# EAGLE board mainboard (EAGLE 9.4.0), part 1 of 2
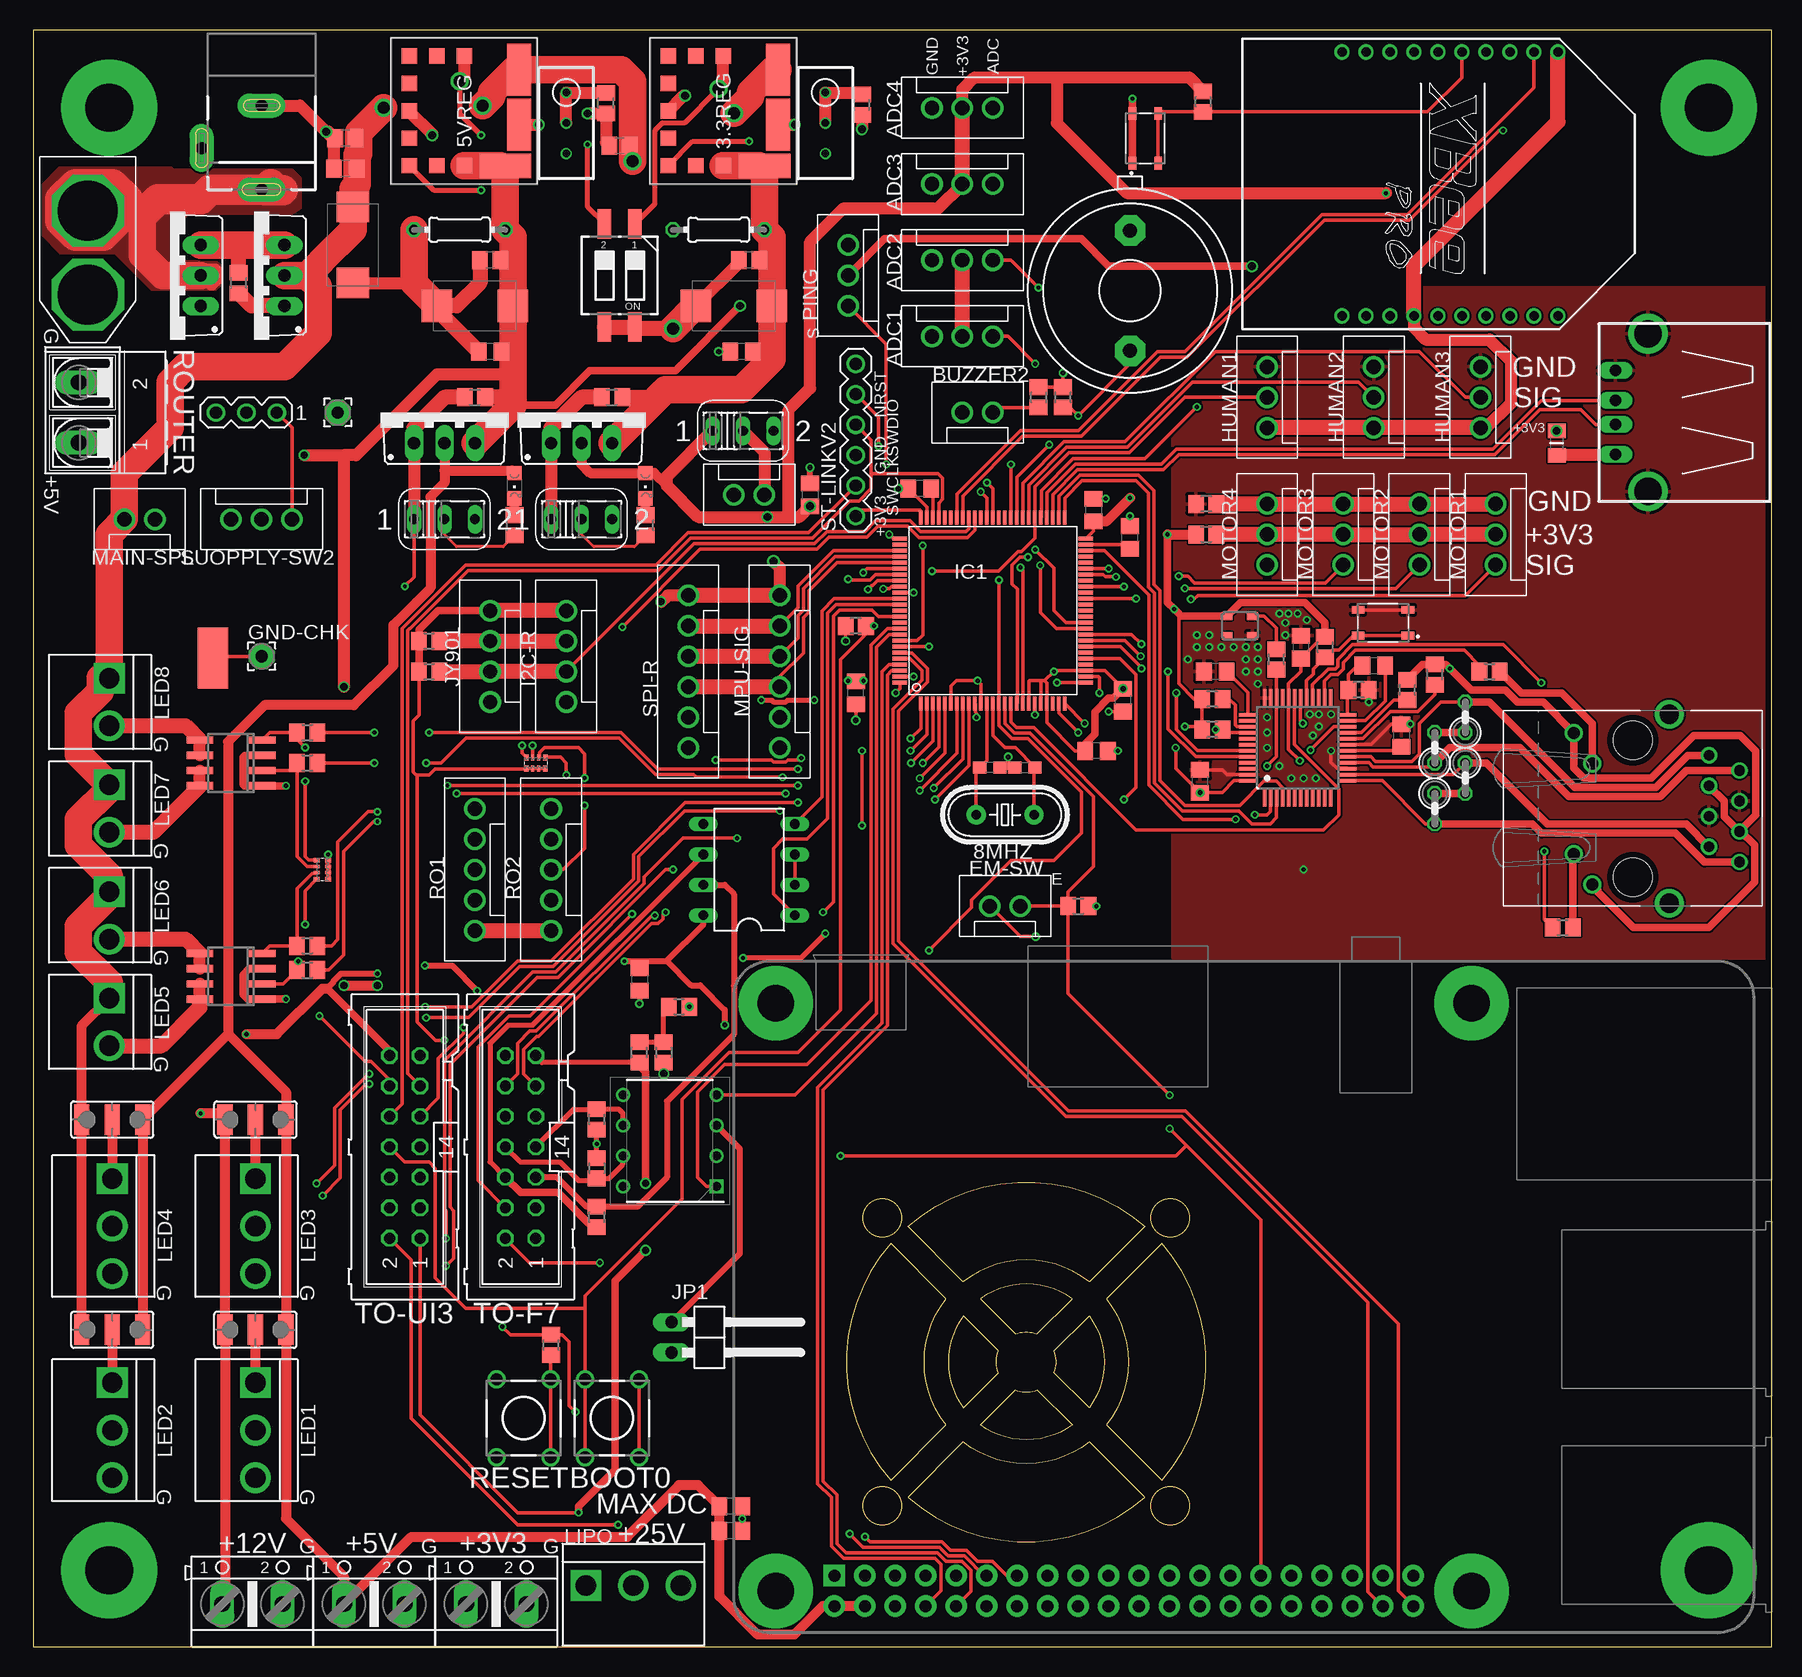
[diagram p0: board, top side]
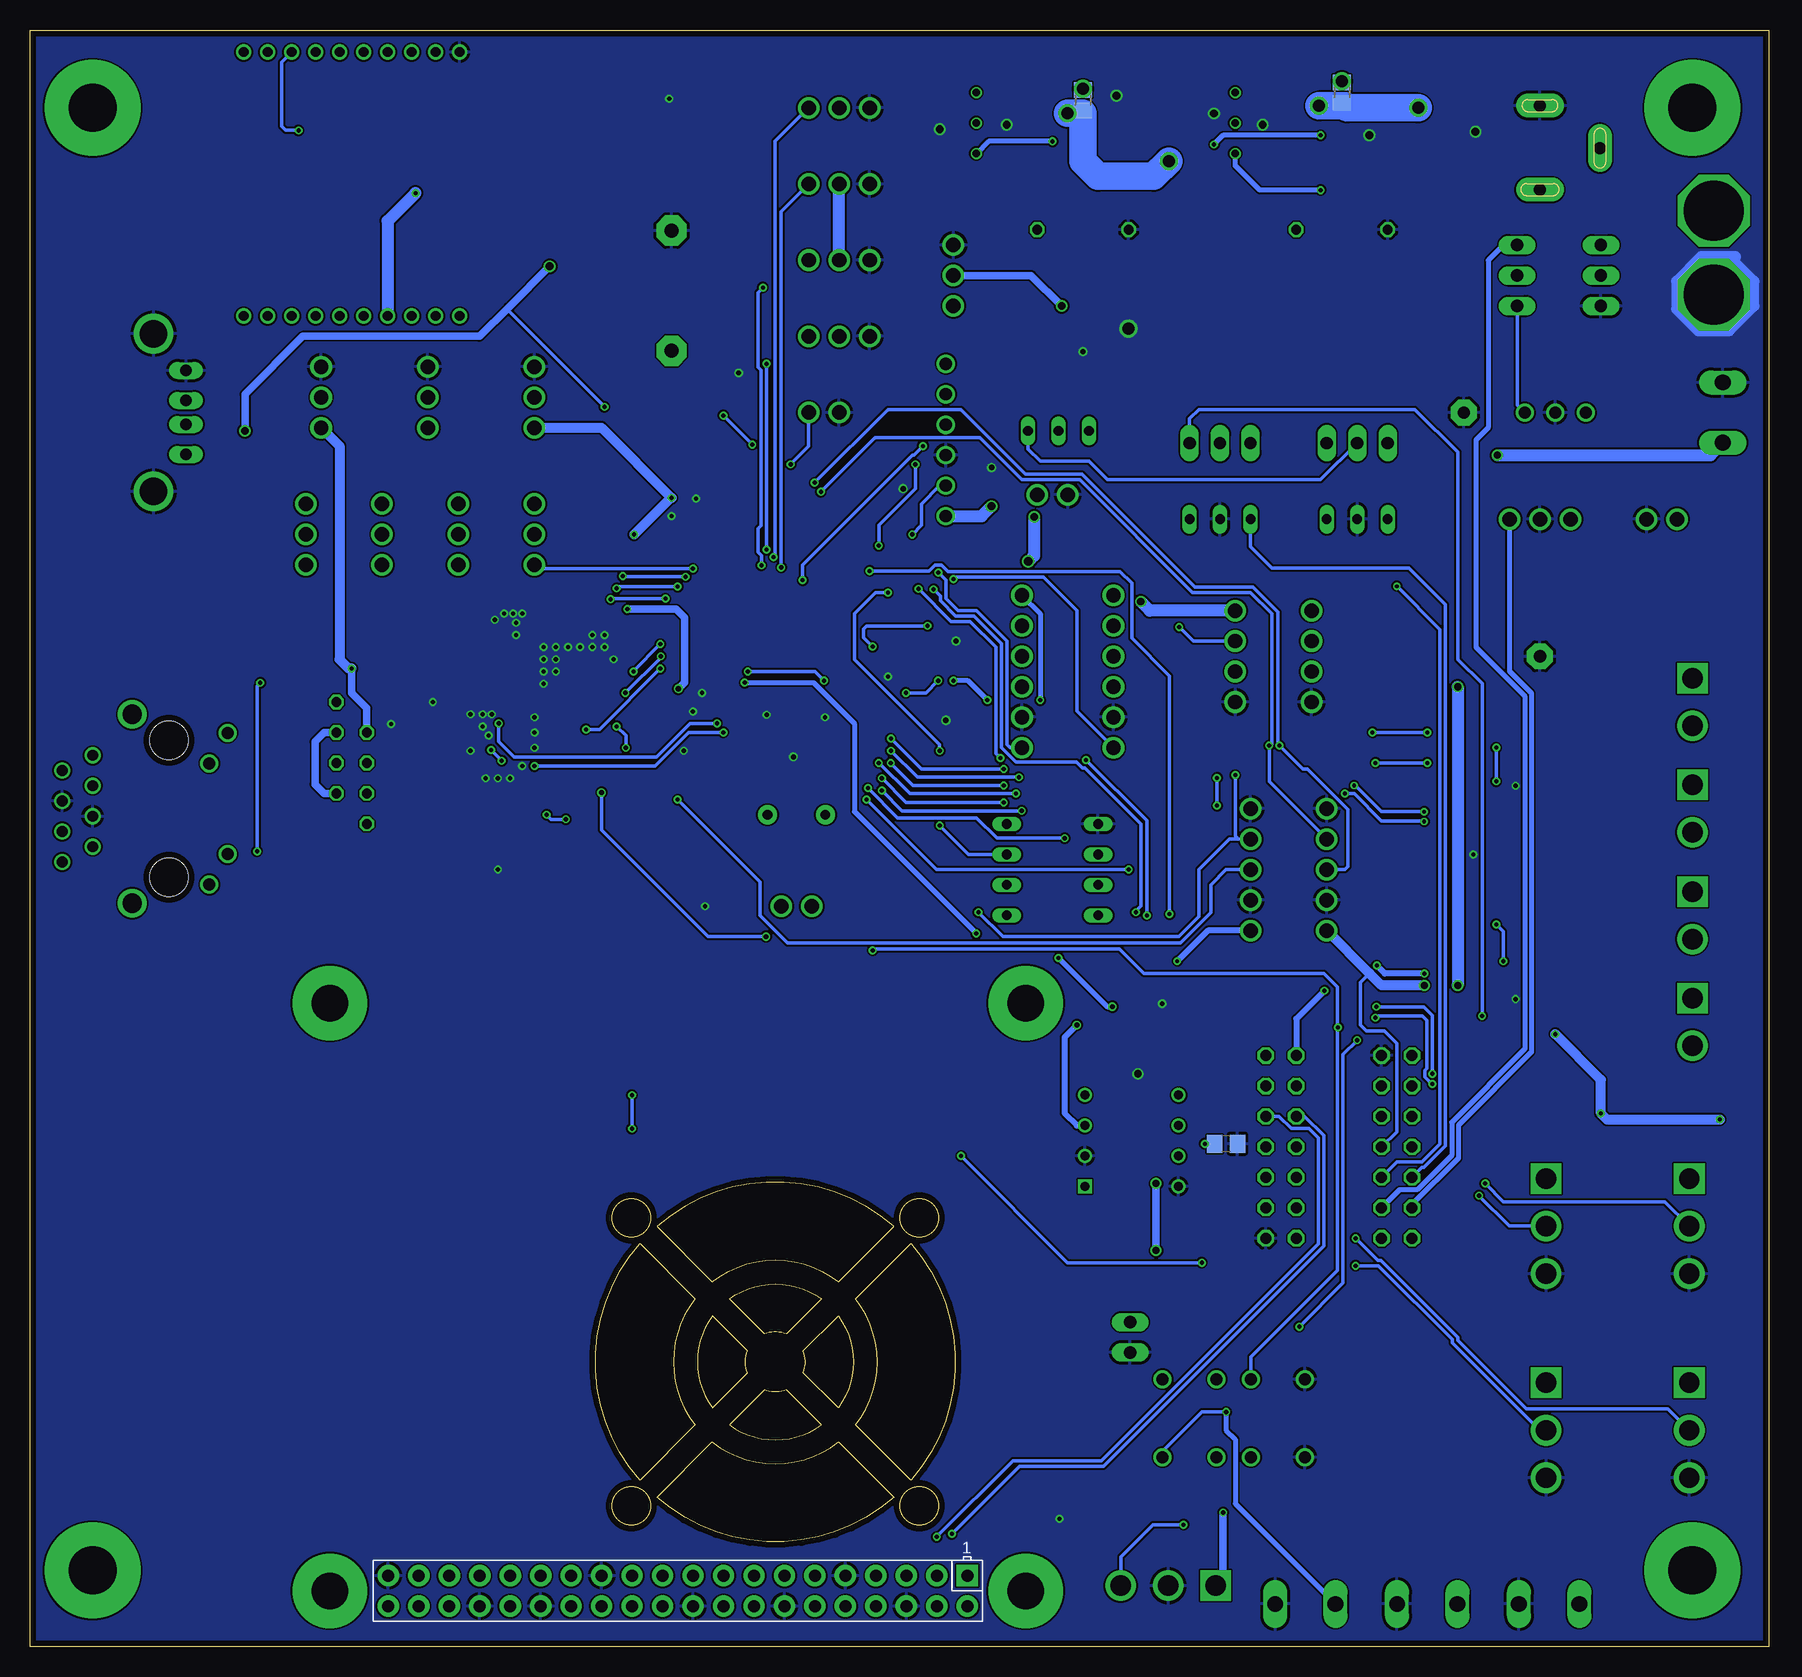
[diagram p1: board, bottom side, seen from below]

Size 144.92 x 134.76 mm. Coordinates in mm from the lower left corner, seen from the top.
Outline: 0,0 144.92,0 144.92,134.76 0,134.76 0,0
Outline: 71.5,13.86 76.11,18.47 arc-76 76.11,29 71.5,33.61 arc82 71.5,13.86
Outline: 92.67,35.02 88.05,30.41 arc76 77.53,30.41 72.91,35.02 arc-82 92.67,35.02
Outline: 92.67,12.45 88.05,17.06 arc-76 77.53,17.06 72.91,12.45 arc82 92.67,12.45
Outline: 89.47,29 arc-76 89.47,18.47 94.08,13.86 arc82 94.08,33.61 89.47,29
Outline: 88.04,27.57 arc-72 88.04,19.9 85.12,22.82 arc43 85.12,24.65 88.04,27.57
Outline: 86.62,28.98 arc72 78.96,28.98 81.88,26.06 arc-43 83.7,26.06 86.62,28.98
Outline: 81.88,21.41 arc43 83.7,21.41 86.62,18.49 arc-72 78.96,18.49 81.88,21.41
Outline: 80.46,22.82 arc-43 80.46,24.65 77.54,27.57 arc72 77.54,19.9 80.46,22.82
Outline: circle at 70.79,11.73 radius 1.6
Outline: circle at 70.79,35.73 radius 1.6
Outline: circle at 94.79,35.73 radius 1.6
Outline: circle at 94.79,11.73 radius 1.6
Copper layers (1*16): Top 0.035mm / dielectric 1.6mm / Bottom 0.035mm
Design rules "Elecrow_2-layer_PCB_eagle_rule": minimum track width 6mil, minimum drill 12mil, track to track 6mil, track to pad 6mil, pad to pad 6mil, via to via 8mil, smd to smd 0mil, copper to edge 20mil, drill to drill 10mil, minimum pad ring 6mil, minimum via ring 6mil, stop-mask expansion 0mil, vias tented up to drill 100mil, thermal gap 10mil
tRestrict: 1 lines

## Footprints (pad centres in the part's own frame; a part is rotated, then mirrored left to right if it is on the bottom)
D/7343-31R = smd 2.55 x 2.7: + 3.175,0; - -3.175,0
C0805 = smd 1.3 x 1.5: 1 -0.95,0; 2 0.95,0
OKL-T/3-W5 = smd 1.27 x 1.27: 1 -10.67,6.1; 5 -1.52,6.1; 6 -1.52,1.52; 7 -6.09,1.52; 8 -8.38,1.52; 9 -10.67,1.52; 10 -10.67,3.81; 11 -1.52,3.81; 12 -3.81,1.52 | smd 4.32 x 2.03: 2 -9.53,10.67; 3 -4.95,10.67 | smd 2.03 x 4.32: 4 -1.52,9.53
HC49U-V = drill 0.8 pad 1.6: 1 -2.413,0; 2 2.413,0
R0805 = smd 1.3 x 1.5: 1 -0.85,0; 2 0.85,0
CON3 = drill 1.2: P$1 -2.54,0; P$2 0,0; P$3 2.54,0
DTS-6 = drill 1: 1 -3.25,2.25; 2 3.25,2.25; 3 -3.25,-2.25; 4 3.25,-2.25
CON2 = drill 1.2: P$1 -1.27,0; P$2 1.27,0
C2012 = smd 1.3 x 1.5: 1 -0.85,0; 2 0.85,0
C1608 = smd 1.1 x 1: 1 -0.85,0; 2 0.85,0
RJ45_PULSEJACK = drill 0.9: 1 4.445,-6.35; 2 3.175,-8.89; 3 1.905,-6.35; 4 0.635,-8.89; 5 -0.635,-6.35; 6 -1.905,-8.89; 7 -3.175,-6.35; 8 -4.445,-8.89 | drill 1: 9 6.325,4.9; 10 3.785,3.38; 11 -3.785,4.9; 12 -6.325,3.38 | drill 1.6: P$5 -7.875,-3.05; P$6 7.875,-3.05 | hole 3.2: -5.715,0; 5.715,0
EXBN8V = smd 0.38 x 0.5: 1 -0.8,-0.475; 4 0.8,-0.475; 5 0.8,0.475; 8 -0.8,0.475 | smd 0.25 x 0.5: 2 -0.25,-0.475; 3 0.25,-0.475; 6 0.25,0.475; 7 -0.25,0.475
SMD2,54-5,08 = smd 2.54 x 5.08: 1 0,0
2,15/1,0 = drill 1.016 pad 2.159 octagon: 1 0,0
CON4 = drill 1.2: P$1 -3.81,0; P$2 -1.27,0; P$3 1.27,0; P$4 3.81,0
LQFP100 = smd 0.3 x 1.2: 1 -6,-7.75; 2 -5.5,-7.75; 3 -5,-7.75; 4 -4.5,-7.75; 5 -4,-7.75; 6 -3.5,-7.75; 7 -3,-7.75; 8 -2.5,-7.75; 9 -2,-7.75; 10 -1.5,-7.75; 11 -1,-7.75; 12 -0.5,-7.75; 13 0,-7.75; 14 0.5,-7.75; 15 1,-7.75; 16 1.5,-7.75; 17 2,-7.75; 18 2.5,-7.75; 19 3,-7.75; 20 3.5,-7.75; 21 4,-7.75; 22 4.5,-7.75; 23 5,-7.75; 24 5.5,-7.75; 25 6,-7.75; 51 6,7.75; 52 5.5,7.75; 53 5,7.75; 54 4.5,7.75; 55 4,7.75; 56 3.5,7.75; 57 3,7.75; 58 2.5,7.75; 59 2,7.75; 60 1.5,7.75; 61 1,7.75; 62 0.5,7.75; 63 0,7.75; 64 -0.5,7.75; 65 -1,7.75; 66 -1.5,7.75; 67 -2,7.75; 68 -2.5,7.75; 69 -3,7.75; 70 -3.5,7.75; 71 -4,7.75; 72 -4.5,7.75; 73 -5,7.75; 74 -5.5,7.75; 75 -6,7.75 | smd 1.2 x 0.3: 26 7.75,-6; 27 7.75,-5.5; 28 7.75,-5; 29 7.75,-4.5; 30 7.75,-4; 31 7.75,-3.5; 32 7.75,-3; 33 7.75,-2.5; 34 7.75,-2; 35 7.75,-1.5; 36 7.75,-1; 37 7.75,-0.5; 38 7.75,0; 39 7.75,0.5; 40 7.75,1; 41 7.75,1.5; 42 7.75,2; 43 7.75,2.5; 44 7.75,3; 45 7.75,3.5; 46 7.75,4; 47 7.75,4.5; 48 7.75,5; 49 7.75,5.5; 50 7.75,6; 76 -7.75,6; 77 -7.75,5.5; 78 -7.75,5; 79 -7.75,4.5; 80 -7.75,4; 81 -7.75,3.5; 82 -7.75,3; 83 -7.75,2.5; 84 -7.75,2; 85 -7.75,1.5; 86 -7.75,1; 87 -7.75,0.5; 88 -7.75,0; 89 -7.75,-0.5; 90 -7.75,-1; 91 -7.75,-1.5; 92 -7.75,-2; 93 -7.75,-2.5; 94 -7.75,-3; 95 -7.75,-3.5; 96 -7.75,-4; 97 -7.75,-4.5; 98 -7.75,-5; 99 -7.75,-5.5; 100 -7.75,-6
DIL08 = drill 0.813 long: 1 -3.81,-3.81; 2 -1.27,-3.81; 3 1.27,-3.81; 4 3.81,-3.81; 5 3.81,3.81; 6 1.27,3.81; 7 -1.27,3.81; 8 -3.81,3.81
LQFP48 = smd 1.5 x 0.3: 1 -4.15,2.75; 2 -4.15,2.25; 3 -4.15,1.75; 4 -4.15,1.25; 5 -4.15,0.75; 6 -4.15,0.25; 7 -4.15,-0.25; 8 -4.15,-0.75; 9 -4.15,-1.25; 10 -4.15,-1.75; 11 -4.15,-2.25; 12 -4.15,-2.75; 25 4.15,-2.75; 26 4.15,-2.25; 27 4.15,-1.75; 28 4.15,-1.25; 29 4.15,-0.75; 30 4.15,-0.25; 31 4.15,0.25; 32 4.15,0.75; 33 4.15,1.25; 34 4.15,1.75; 35 4.15,2.25; 36 4.15,2.75 | smd 0.3 x 1.5: 13 -2.75,-4.15; 14 -2.25,-4.15; 15 -1.75,-4.15; 16 -1.25,-4.15; 17 -0.75,-4.15; 18 -0.25,-4.15; 19 0.25,-4.15; 20 0.75,-4.15; 21 1.25,-4.15; 22 1.75,-4.15; 23 2.25,-4.15; 24 2.75,-4.15; 37 2.75,4.15; 38 2.25,4.15; 39 1.75,4.15; 40 1.25,4.15; 41 0.75,4.15; 42 0.25,4.15; 43 -0.25,4.15; 44 -0.75,4.15; 45 -1.25,4.15; 46 -1.75,4.15; 47 -2.25,4.15; 48 -2.75,4.15
DIP781W56P254L950H533Q8N = drill 0.759 pad 1.159 square: 1 -3.905,3.81 | drill 0.759 pad 1.159: 2 -3.905,1.27; 3 -3.905,-1.27; 4 -3.905,-3.81; 5 3.905,-3.81; 6 3.905,-1.27; 7 3.905,1.27; 8 3.905,3.81
1X02/90 = drill 1.016 long: 1 -1.27,-3.81; 2 1.27,-3.81
B3P-VH = drill 1.7 square: 1 -3.96,0 | drill 1.7: 2 0,0; 3 3.96,0
B2P-VH = drill 1.7 square: 1 -1.98,0 | drill 1.7: 2 1.98,0
MA03-1 = drill 1.016: 1 -2.54,0; 2 0,0; 3 2.54,0
CON6 = drill 1.2: P$1 -6.35,0; P$2 -3.81,0; P$3 -1.27,0; P$4 1.27,0; P$5 3.81,0; P$6 6.35,0
0207/2V = drill 0.813 octagon: 1 -1.27,0; 2 1.27,0
TO220BV = drill 1.016 long: D 0,-2.54; G -2.54,-2.54; S 2.54,-2.54
0204/7 = drill 0.813 octagon: 1 -3.81,0; 2 3.81,0
CON5 = drill 1.2: P$1 -5.08,0; P$2 -2.54,0; P$3 0,0; P$4 2.54,0; P$5 5.08,0
AK500/2-H = drill 1.321 long: 1 -2.515,0; 2 2.515,0
M251 = drill 0.813 long: 1 -2.54,0; 2 0,0; 3 2.54,0
SW_SKRPACE010 = smd 1.05 x 0.65: 1 -2.075,1.075; 2 2.075,1.075; 3 -2.075,-1.075; 4 2.075,-1.075
F/EE17P = drill 1.194 pad 2.54 octagon: 1 -5.004,0; 2 5.004,0
SJ_2W = smd 1.27 x 2.54: 1 -2.54,0; 2 0,0; 3 2.54,0
CHIPLED_0805 = smd 1.2 x 1.2: A 0,-1.05; C 0,1.05
RTRIM3296W = drill 0.61: 1 0,-2.54; 2 0,0; 3 0,2.54
CTS-219-02 = smd 1.13 x 2.44: 1 -1.27,-4.3; 2 1.27,-4.3; 3 1.27,4.3; 4 -1.27,4.3
MA06-1 = drill 1.016: 1 -6.35,0; 2 -3.81,0; 3 -1.27,0; 4 1.27,0; 5 3.81,0; 6 6.35,0
SO8 = smd 0.6 x 2.2: 1 -1.905,-2.6; 2 -0.635,-2.6; 3 0.635,-2.6; 4 1.905,-2.6; 5 1.905,2.6; 6 0.635,2.6; 7 -0.635,2.6; 8 -1.905,2.6
ML14 = drill 0.914 octagon: 1 -7.62,-1.27; 2 -7.62,1.27; 3 -5.08,-1.27; 4 -5.08,1.27; 5 -2.54,-1.27; 6 -2.54,1.27; 7 0,-1.27; 8 0,1.27; 9 2.54,-1.27; 10 2.54,1.27; 11 5.08,-1.27; 12 5.08,1.27; 13 7.62,-1.27; 14 7.62,1.27
ASE = smd 0.9 x 0.65: 1 -1.05,-0.825; 2 1.05,-0.825; 3 1.05,0.825; 4 -1.05,0.825
XT60 = drill 5 octagon: + 4.5,0; - 11.5,0
F0805MP = smd 1.2 x 1.5: 1 -1.016,0; 2 1.016,0
RASPI_BOARD_B+_FULL_PAD = drill 1 pad 1.778 square: 1 8.37,51.23 | drill 1 pad 1.778: 2 8.37,53.77; 3 10.91,51.23; 4 10.91,53.77; 5 13.45,51.23; 6 13.45,53.77; 7 15.99,51.23; 8 15.99,53.77; 9 18.53,51.23; 10 18.53,53.77; 11 21.07,51.23; 12 21.07,53.77; 13 23.61,51.23; 14 23.61,53.77; 15 26.15,51.23; 16 26.15,53.77; 17 28.69,51.23; 18 28.69,53.77; 19 31.23,51.23; 20 31.23,53.77; 21 33.77,51.23; 22 33.77,53.77; 23 36.31,51.23; 24 36.31,53.77; 25 38.85,51.23; 26 38.85,53.77; 27 41.39,51.23; 28 41.39,53.77; 29 43.93,51.23; 30 43.93,53.77; 31 46.47,51.23; 32 46.47,53.77; 33 49.01,51.23; 34 49.01,53.77; 35 51.55,51.23; 36 51.55,53.77; 37 54.09,51.23; 38 54.09,53.77; 39 56.63,51.23; 40 56.63,53.77 | drill 3.048 pad 6.2: DRILL_1 3.5,52.5; DRILL_2 61.5,52.5; DRILL_3 3.5,3.5; DRILL_4 61.5,3.5
MJ-179P = drill 1 pad 2 long: 1 3,0; 2 -4,0; 3 -0.45,-5
PN87520-S = drill 0.95 long: 1 -3.5,2.71; 2 -1,2.71; 3 1,2.71; 4 3.5,2.71 | drill 2.3 pad 2.9: S1 -6.57,0; S2 6.57,0
AK500/2 = drill 1.321 long: 1 -2.515,0; 2 2.515,0
XBEE-PRO = drill 0.8 pad 1.27: 1 -11,9; 2 -11,7; 3 -11,5; 4 -11,3; 5 -11,1; 6 -11,-1; 7 -11,-3; 8 -11,-5; 9 -11,-7; 10 -11,-9; 11 11,-9; 12 11,-7; 13 11,-5; 14 11,-3; 15 11,-1; 16 11,1; 17 11,3; 18 11,5; 19 11,7; 20 11,9

## Placement (x,y rotation side)
3.3C1  100u  [D/7343-31R]  58.42,111.76 0 top
3.3C2  0.1u  [C0805]  59.05,107.95 180 top
3.3REG  OKL-T_6-W12N-C  [OKL-T/3-W5]  51.44,121.92 270 top
5C1  100u  [D/7343-31R]  36.83,111.76 0 top
5C2  0.1u  [C0805]  38.1,107.95 180 top
5VREG  OKL-T_6-W12N-C  [OKL-T/3-W5]  29.84,121.92 270 top
5VS-C1  0.1u  [C0805]  50.55,55.63 270 top
8MHZ  P-08669_HUSG-12.000-20  [HC49U-V]  81.03,69.34 180 top
9C1  100u  [D/7343-31R]  26.67,116.84 90 top
12C2  0.1u  [C0805]  26.04,123.19 180 top
100  330  [R0805]  51.05,93.47 90 top
ADC1  XH-3  [CON3]  77.47,109.22 180 top
ADC2  XH-3  [CON3]  77.47,115.57 180 top
ADC3  XH-3  [CON3]  77.47,121.92 180 top
ADC4  XH-3  [CON3]  77.47,128.27 180 top
BAT-JP1  0  [R0805]  53.85,53.34 0 top
BAT-R1  2.2k  [R0805]  50.55,49.53 90 top
BAT-R2  330  [R0805]  52.58,49.53 270 top
BOOT0-STM  DTS-6  [DTS-6]  48.26,19.05 270 top
BUZ-R1  4.7k  [R0805]  85.85,104.14 90 top
BUZ-R2  4.7k  [R0805]  83.82,104.14 90 top
BUZZER2  XH-2  [CON2]  78.74,102.87 0 top
C1  22uF25V  [C2012]  26.04,125.73 180 top
C2  10uF10V  [C2012]  38.1,115.57 180 top
C3  22uF25V  [C2012]  48.9,125.09 180 top
C4  10uF10V  [C2012]  59.69,115.57 180 top
C5  22pF  [C1608]  79.76,73.28 180 top
C6  22pF  [C1608]  82.68,73.28 0 top
CAN-C1  4.7u  [C0805]  45.21,41.91 180 bottom
CAN-R1  51  [R0805]  46.99,39.88 270 top
CAN-R2  51  [R0805]  46.99,43.94 90 top
CN1  [RJ45_PULSEJACK]  133.35,69.85 90 top
EM-SW  XH-2  [CON2]  81.03,61.72 0 top
FET-R9  100  [R0805]  22.86,56.39 0 top
FET-R10  100  [R0805]  22.86,58.42 0 top
FET-R13  100  [R0805]  22.86,73.66 0 top
FET-R14  100  [R0805]  22.86,76.2 0 top
FETR2  4.7k  [EXBN8V]  24.13,64.77 90 top
GND-CH  GND  [SMD2,54-5,08]  14.99,82.42 0 top
GND-CHK  GND  [2,15/1,0]  19.05,82.55 0 top
GND-CHK1  GND  [2,15/1,0]  25.4,102.87 0 top
HUMAN1  XH-3  [CON3]  102.87,104.14 90 top
HUMAN2  XH-3  [CON3]  111.76,104.14 90 top
HUMAN3  XH-3  [CON3]  120.65,104.14 90 top
I2C-R  XH-4  [CON4]  44.45,82.55 90 top
I2C-R1  4.7K  [R0805]  33.02,81.28 0 top
I2C-R2  4.7K  [R0805]  33.02,83.82 0 top
IC1  STM32F429VGT  [LQFP100]  80.01,86.36 0 top
IC2  LTC485N  [DIL08]  59.69,64.77 90 top
IC3  DP83848  [LQFP48]  105.41,74.93 90 top
IC4  MCP2561-E_P  [DIP781W56P254L950H533Q8N]  53.09,42.16 180 top
JP1  [1X02/90]  57.02,25.78 270 top
JY901  XH-4  [CON4]  38.1,82.55 90 top
LED1  [B3P-VH]  18.54,18.03 270 top
LED2  [B3P-VH]  6.6,18.03 270 top
LED3  [B3P-VH]  18.54,35.05 270 top
LED4  [B3P-VH]  6.6,35.05 270 top
LED5  [B2P-VH]  6.35,52.07 270 top
LED6  [B2P-VH]  6.35,60.96 270 top
LED7  [B2P-VH]  6.35,69.85 270 top
LED8  [B2P-VH]  6.35,78.74 270 top
LIPO  [B3P-VH]  50.04,5.08 0 top
M-JP-GND  0  [R0805]  97.79,95.25 180 top
M-JP-VCC  0  [R0805]  97.79,92.71 0 top
MAIN-SPL  XH-2  [CON2]  8.89,93.98 0 top
MAINSW2  MAIN  [MA03-1]  17.78,102.87 180 top
MOTOR1  XH-3  [CON3]  121.92,92.71 90 top
MOTOR2  XH-3  [CON3]  115.57,92.71 90 top
MOTOR3  XH-3  [CON3]  109.22,92.71 90 top
MOTOR4  XH-3  [CON3]  102.87,92.71 90 top
MPU-SIG  XH-6  [CON6]  62.23,81.28 90 top
NT-C1  0.1u  [C0805]  105.66,83.31 270 top
NT-C2  0.1u  [C0805]  111.76,81.79 0 top
NT-C3  0.1u  [C0805]  114.05,75.95 270 top
NT-C4  0.1u  [C0805]  97.28,72.14 90 top
NT-C5  0.1u  [C0805]  98.55,81.28 180 top
NT-JP  0  [R0805]  103.63,82.3 90 top
NT-R1  2k  [R0805]  98.3,76.45 180 top
NT-R2  2k  [R0805]  98.3,78.99 180 top
NT-R3  4.87k  [R0805]  110.49,79.76 180 top
NT-R4  2k  [R0805]  114.55,79.76 90 top
NT-R5  2k  [R0805]  116.84,81.03 90 top
NT-R6  51  [0207/2V]  119.38,77.47 90 top
NT-R7  51  [0207/2V]  116.84,74.93 90 top
NT-R8  51  [0207/2V]  119.38,72.39 270 top
NT-R9  51  [0207/2V]  116.84,69.85 270 top
NT-R10  330  [R0805]  121.41,81.28 0 top
NT-R11  330  [R0805]  127.51,59.94 0 top
NT-RST-R  4.7K  [R0805]  107.7,83.31 90 top
PING  XH-3  [CON3]  67.94,114.3 90 top
Q2  IRF9530  [TO220BV]  45.72,102.87 0 top
Q3  IRF9530  [TO220BV]  11.43,114.3 90 top
Q4  IRF9530  [TO220BV]  34.29,102.87 0 top
Q5  IRF9530  [TO220BV]  18.41,114.3 90 top
R1  1.2k  [0204/7]  35.56,118.11 180 top
R2  1.2k  [0204/7]  57.15,118.11 180 top
RESET-STM  DTS-6  [DTS-6]  40.89,19.05 90 top
RO1  XH-5  [CON5]  36.83,64.77 90 top
RO2  XH-5  [CON5]  43.18,64.77 90 top
RO-R  4.7k  [EXBN8V]  41.91,73.66 0 top
ROUTER  [AK500/2-H]  3.81,102.87 90 top
RP-C1  0.1u  [C0805]  58.17,9.65 180 top
RP-C2  0.1u  [C0805]  58.17,11.68 180 top
RS485-S  100  [R0805]  46.99,35.81 90 top
S1  VM  [M251]  34.29,93.98 0 top
S2  VM  [M251]  59.18,101.35 0 top
S3  VM  [M251]  45.72,93.98 0 top
S4  SKRPACE010  [SW_SKRPACE010]  92.71,125.73 90 top
S5  SKRPACE010  [SW_SKRPACE010]  112.52,85.34 180 top
SG1  F/EE17P  [F/EE17P]  91.44,113.03 90 top
SJ1  [SJ_2W]  18.54,43.94 0 top
SJ2  [SJ_2W]  18.54,26.42 0 top
SJ3  [SJ_2W]  6.6,43.94 0 top
SJ4  [SJ_2W]  6.6,26.42 0 top
SP-LED1  [CHIPLED_0805]  40.13,96.77 180 top
SP-LED2  [CHIPLED_0805]  51.05,96.77 180 top
SP-R1  1.2k  [R0805]  47.75,128.65 90 top
SP-R2  20K  [R0805]  35.56,129.54 270 bottom
SP-R3  1.2k  [R0805]  69.09,128.52 90 top
SP-R4  20K  [R0805]  57.15,128.91 270 bottom
SP-R5  330  [R0805]  40.13,93.47 90 top
SP-R6  4.7K  [R0805]  17.14,113.67 90 top
SP-R7  4.7K  [R0805]  48.26,104.14 0 top
SP-R8  4.7K  [R0805]  36.83,104.14 0 top
SP-RC1  20k  [RTRIM3296W]  44.45,127 180 top
SP-RC2  20k  [RTRIM3296W]  66.04,127 180 top
SP-SW2  219-02  [CTS-219-02]  48.9,114.3 180 top
SPI-R  XH-6  [CON6]  54.61,81.28 90 top
ST-LINKV2  [MA06-1]  68.58,100.58 90 top
STM-C1  0.1u  [C0805]  88.65,74.68 180 top
STM-C2  0.1u  [C0805]  90.87,78.9 90 top
STM-C3  0.1u  [C0805]  88.39,94.74 270 top
STM-C4  0.1u  [C0805]  68.58,79.5 90 top
STM-C5  0.1u  [C0805]  73.91,96.52 180 top
STM-C6  0.1u  [C0805]  91.44,92.46 90 top
STM-C7  0.1u  [C0805]  64.77,96.01 270 top
STM-R1  4.7K  [R0805]  43.18,25.15 90 top
STM-R2  4.7K  [R0805]  68.58,85.09 180 top
SUOPPLY-SW2  XH-3  [CON3]  19.05,93.98 180 top
SW-R1  4.7k  [R0805]  87.12,61.72 0 top
T3  [SO8]  16.51,55.88 90 top
T4  [SO8]  16.51,73.66 90 top
TO-F7  [ML14]  40.64,41.66 90 top
TO-UI3  [ML14]  30.99,41.66 90 top
U$1  ASE  [ASE]  100.58,85.09 0 top
U$2  XT60  [XT60]  4.57,124.21 270 top
USB-POLY  400mA  [F0805MP]  127,100.33 270 top
VOLTAGE-METER2  XH-2  [CON2]  59.69,96.01 180 top
X1  RASPI_BOARD_B+#_FP  [RASPI_BOARD_B+_FULL_PAD]  58.42,57.15 180 bottom
X2  DCJACK-MJ179P  [MJ-179P]  19.05,124.46 270 top
X3  C-07674_USB-A  [PN87520-S]  134.62,102.87 90 top
X4  [AK500/2]  28.45,3.56 0 top
X5  [AK500/2]  38.61,3.56 0 top
X6  [AK500/2]  18.29,3.56 0 top
XB1  XBEE-PRO  [XBEE-PRO]  118.11,121.92 270 top
XBEE-RST  4.7K  [R0805]  97.54,128.78 90 top

## Library data of the parts
3.3C1 3.3C2 5C1 5C2 9C1 12C2 = rcl; SPICEPREFIX: B
3.3REG 5VREG = SamacSys_Parts; ARROW_PART_NUMBER: OKL-T/6-W12N-C; ARROW_PRICE/STOCK: https://www.arrow.com/en/products/okl-t6-w12n-c/murata-power-solutions; DESCRIPTION: MURATA POWER SOLUTIONS - OKL-T/6-W12N-C - DC/DC CONVERTER, 30W, ADJ OUTPUT; HEIGHT: mm; MANUFACTURER_NAME: Murata Electronics; MANUFACTURER_PART_NUMBER: OKL-T/6-W12N-C; RS_PART_NUMBER: 1736944P; RS_PRICE/STOCK: http://uk.rs-online.com/web/p/products/1736944P
5VS-C1 CAN-C1 NT-C1-NT-C5 RP-C1 RP-C2 STM-C1-STM-C7 = rcl
8MHZ CN1 = Akizuki
100 ADC1-ADC4 BAT-JP1 BAT-R1 BAT-R2 BUZ-R1 BUZ-R2 BUZZER2 CAN-R1 CAN-R2 EM-SW FET-R9 FET-R10 FET-R13 FET-R14 HUMAN1-HUMAN3 I2C-R I2C-R1 I2C-R2 JY901 M-JP-GND M-JP-VCC MOTOR1-MOTOR4 MPU-SIG NT-JP NT-R1-NT-R5 NT-R10 NT-R11 NT-RST-R PING RO1 RO2 RS485-S SP-R1-SP-R8 SPI-R STM-R1 STM-R2 SW-R1 XBEE-RST = 0@Mylibrary-main1
BOOT0-STM MAIN-SPL RESET-STM SUOPPLY-SW2 VOLTAGE-METER2 = forprint
C1-C6 NT-R6-NT-R9 R1 R2 SP-RC1 SP-RC2 = resistor
FETR2 RO-R = resistor-dil; OC_FARNELL: unknown; OC_NEWARK: unknown
GND-CH GND-CHK GND-CHK1 = wirepad
IC1 = micro-stm_v3
IC2 = linear-technology; OC_FARNELL: unknown; OC_NEWARK: unknown
IC3 = national-semiconductor; MPN: DP83848VYB; OC_FARNELL: 1286817; OC_NEWARK: 11N4484
IC4 = MCP2561-E_P; ALLIED_NUMBER: 70415102; ALLIED_PRICE-STOCK: https://www.alliedelec.com/microchip-technology-inc-mcp2561-e-p/70415102/; DESCRIPTION: CAN Transceiver 1Mbps 5V 125degC PDIP8 Microchip MCP2561-E/P, CAN Transceiver 1-channel IEC 61000-4-2, 8-Pin PDIP; HEIGHT: 5.334mm; MANUFACTURER_NAME: Microchip; MANUFACTURER_PART_NUMBER: MCP2561-E/P; MOUSER_PART_NUMBER: 579-MCP2561-E/P; MOUSER_PRICE-STOCK: https://www.mouser.com/Search/Refine.aspx?Keyword=579-MCP2561-E%2FP; RS_PART_NUMBER: 1652124; RS_PRICE-STOCK: http://uk.rs-online.com/web/p/products/1652124
JP1 = 0pinhead
LED1-LED8 LIPO = jst-vh
MAINSW2 ST-LINKV2 = 0con-lstb; OC_FARNELL: unknown; OC_NEWARK: unknown
Q2-Q5 = transistor-power
ROUTER X4-X6 = con-ptr500; OC_FARNELL: unknown; OC_NEWARK: unknown
S1-S3 = switch-k
S4 S5 = SKRPACE010; AVAILABILITY: Unavailable; DESCRIPTION: Switch Tactile N.O. SPST Button J-Bend 0.05A 16VDC 2.55N SMD Automotive T/R; MF: ALPS; MP: SKRPACE010; PACKAGE: None; PRICE: None
SG1 = buzzer; OC_FARNELL: unknown; OC_NEWARK: unknown
SJ1-SJ4 = jumper
SP-LED1 SP-LED2 = led
SP-SW2 = switch-dil; OC_FARNELL: unknown; OC_NEWARK: unknown
T3 T4 = zetex; OC_FARNELL: unknown; OC_NEWARK: unknown
TO-F7 TO-UI3 = 0con-harting-ml; OC_FARNELL: unknown; OC_NEWARK: unknown
U$1 = crystal; OC_FARNELL: unknown; OC_NEWARK: unknown
U$2 = XT60
USB-POLY = polyswitch
X1 = raspberrypi_bastelstube_v13
X2 = kamiki-dcjack
X3 = Akizuki; OC_FARNELL: unknown; OC_NEWARK: unknown
XB1 = maxstream; MPN: XBP24-AWI-001; OC_FARNELL: 1337916; OC_NEWARK: 42M2667

## Nets
3V3-SW: Q2.G S3.1 SP-R7.1 TO-UI3.6
3V3A: X1.1
3V3B: X1.17
5V-SW: Q4.G S1.1 SP-R8.1 TO-UI3.5
12V-B: Q3.D U$2.+ X2.1
12V-SW: MAINSW2.1 Q5.G SP-R6.1 SUOPPLY-SW2.P$1 TO-UI3.4
+3V3: ADC1.P$2 ADC2.P$2 ADC3.P$2 ADC4.P$2 BOOT0-STM.1 BOOT0-STM.2 CN1.3 CN1.6 CN1.9 CN1.12 EM-SW.P$1 HUMAN1.P$1 HUMAN2.P$1 HUMAN3.P$1 I2C-R1.1 I2C-R2.1 I2C-R.P$4 IC1.6 IC1.11 IC1.19 IC1.21 IC1.22 IC1.28 IC1.50 IC1.75 IC1.100 IC3.22 IC3.32 IC3.48 JY901.P$4 M-JP-VCC.1 MPU-SIG.P$6 NT-C1.2 NT-C4.1 NT-R1.2 NT-R2.2 NT-R4.2 NT-R5.2 NT-R6.1 NT-R7.2 NT-R8.2 NT-R9.1 NT-RST-R.2 Q2.D RO-R.1 RO-R.2 RO-R.3 RO-R.4 S2.1 SP-LED2.A SPI-R.P$6 ST-LINKV2.1 STM-C1.2 STM-C2.2 STM-C3.2 STM-C4.2 STM-C7.2 STM-R1.2 U$1.4 X5.1 XB1.1 XB1.14 XBEE-RST.2
+3V3S: 3.3C1.+ 3.3C2.1 3.3REG.4 3.3REG.5 C4.1 Q2.S R2.1 SP-R7.2 TO-UI3.12
+5V: Q4.D RP-C1.2 RP-C2.2 S2.3 SJ1.3 SJ2.3 SJ3.3 SJ4.3 SP-LED1.A X1.2 X1.4 X4.1
+5VS: 5C1.+ 5C2.1 5VREG.4 5VREG.5 5VS-C1.1 C2.1 IC1.55 IC2.8 IC4.3 JP1.1 PING.P$2 Q4.S R1.1 RO1.P$1 RO2.P$1 ROUTER.1 SP-R8.2 TO-UI3.7 USB-POLY.1
+12V: 3.3REG.2 5VREG.2 9C1.+ 12C2.1 C1.1 C3.1 LED5.1 LED6.1 LED7.1 LED8.1 MAIN-SPL.P$1 Q5.D SJ1.1 SJ2.1 SJ3.1 SJ4.1 SP-R2.2 SP-R4.2 TO-F7.14 TO-UI3.14 X6.1
+12VS: Q3.S Q5.S SP-R6.2 TO-UI3.3
ADC1: ADC1.P$1 IC1.36
ADC2: ADC2.P$1 IC1.35
ADC3: ADC3.P$1 IC1.18
ADC4: ADC4.P$1 IC1.17
BOOT0: BOOT0-STM.3 BOOT0-STM.4 IC1.94 STM-R2.1 TO-UI3.8
BOOT-RX: IC1.69 XB1.2
BOOT-TX: IC1.68 XB1.3
BUZZER1: BUZ-R1.1 IC1.59 SG1.1
BUZZER2: BUZ-R2.1 BUZZER2.P$2 IC1.60
CAN-H: CAN-R1.2 IC4.7 TO-F7.8
CAN-L: CAN-R2.2 IC4.6 TO-F7.7
CAN-RX: IC1.91 IC4.1
CAN-TX: IC1.92 IC4.4
EMERGENCY: EM-SW.P$2 IC1.15 SW-R1.1 TO-F7.2 X1.29
ETH_CRS_DV: IC1.32 IC3.40 NT-R1.1
ETH_MDC: IC1.16 IC3.31
ETH_MDIO: IC1.25 IC3.30
ETH_REF_CLK: IC1.24 IC3.34 NT-JP.1
ETH_RXD0: IC1.33 IC3.43
ETH_RXD1: IC1.34 IC3.44
ETH_TX_EN: IC1.48 IC3.2
ETH_TXD0: IC1.51 IC3.3
ETH_TXD1: IC1.52 IC3.4
F7-F4-SIG1: IC1.84 TO-F7.12
F7-F4-SIG2: IC1.83 TO-F7.11
F7-RS-SIG1: TO-F7.10 X1.11
F7-RS-SIG2: TO-F7.9 X1.13
FET1: IC1.9 LED1.2
FET2: IC1.8 LED2.2
FET3: IC1.7 LED3.2
FET4: IC1.5 LED4.2
FET5: FET-R9.2 IC1.4
FET6: FET-R10.2 IC1.3
FET7: FET-R13.2 IC1.2
FET8: FET-R14.2 IC1.1
GND: 3.3C1.- 3.3C2.2 3.3REG.3 3.3REG.7 5C1.- 5C2.2 5VREG.3 5VREG.7 5VS-C1.2 9C1.- 12C2.2 100.1 ADC1.P$3 ADC2.P$3 ADC3.P$3 ADC4.P$3 BAT-R2.2 BUZ-R1.2 BUZ-R2.2 BUZZER2.P$1 C1.2 C2.2 C3.2 C4.2 C5.1 C6.1 CAN-C1.1 CN1.4 CN1.5 FETR2.1 FETR2.2 FETR2.3 FETR2.4 GND-CH.1 GND-CHK1.1 GND-CHK.1 HUMAN1.P$3 HUMAN2.P$3 HUMAN3.P$3 I2C-R.P$1 IC1.10 IC1.20 IC1.27 IC1.74 IC1.99 IC2.5 IC3.15 IC3.19 IC3.35 IC3.36 IC3.47 IC4.2 IC4.8 JP1.2 JY901.P$1 LED1.3 LED2.3 LED3.3 LED4.3 LIPO.2 M-JP-GND.2 MAIN-SPL.P$2 MAINSW2.2 MPU-SIG.P$2 NT-C1.1 NT-C3.1 NT-C4.2 NT-C5.2 NT-R3.1 PING.P$3 Q3.G R1.2 R2.2 RESET-STM.1 RESET-STM.2 RO1.P$2 RO1.P$5 RO2.P$2 RO2.P$5 ROUTER.2 RP-C1.1 RP-C2.1 S1.2 S3.2 S4.1 S4.2 S5.3 S5.4 SG1.2 SP-R1.1 SP-R3.1 SP-R5.1 SP-SW2.3 SP-SW2.4 SPI-R.P$2 ST-LINKV2.3 STM-C1.1 STM-C2.1 STM-C3.1 STM-C4.1 STM-C5.2 STM-C6.2 STM-C7.1 STM-R2.2 SUOPPLY-SW2.P$2 SW-R1.2 T3.1 T3.3 T4.1 T4.3 TO-F7.1 TO-UI3.13 U$1.2 U$2.- VOLTAGE-METER2.P$2 X1.6 X1.9 X1.14 X1.20 X1.25 X1.30 X1.34 X1.39 X2.2 X3.4 X3.S1 X3.S2 X4.2 X5.2 X6.2 XB1.10
HUMAN1: HUMAN1.P$2 IC1.56 TO-F7.4
HUMAN2: HUMAN2.P$2 IC1.57
HUMAN3: HUMAN3.P$2 IC1.58
LED5: LED5.2 T3.7 T3.8
LED6: LED6.2 T3.5 T3.6
LED7: LED7.2 T4.7 T4.8
LED8: LED8.2 T4.5 T4.6
LED_LINK: IC3.28 NT-R11.1
LEDACT_LINK: IC3.26 NT-R10.1
LIPO: BAT-R1.1 LIPO.1 TO-F7.13 TO-UI3.1
LTC-SIG: IC1.85 IC2.2 IC2.3
MISO: IC1.79 MPU-SIG.P$4 SPI-R.P$4
MOSI: IC1.80 MPU-SIG.P$3 SPI-R.P$3
MOTOR-CH1: IC1.40 MOTOR1.P$1
MOTOR-CH2: IC1.42 MOTOR2.P$1
MOTOR-CH3: IC1.44 MOTOR3.P$1
MOTOR-CH4: IC1.45 MOTOR4.P$1
MOTOR-FET: LIPO.3 TO-UI3.2
MPU-SIG: IC1.81 MPU-SIG.P$1
N$1: IC1.73 STM-C5.1
N$2: IC1.49 STM-C6.1
N$3: SP-R1.2 SP-RC1.1 SP-RC1.2
N$4: CAN-C1.2 CAN-R1.1 CAN-R2.1
N$5: SP-LED1.C SP-R5.2
N$6: NT-JP.2 U$1.3
N$7: SP-R3.2 SP-RC2.1 SP-RC2.2
N$8: IC3.29 NT-RST-R.1 S5.1 S5.2
N$9: 5VREG.6 SP-RC1.3
N$10: IC3.23 NT-C2.2
N$11: S2.2 VOLTAGE-METER2.P$1
N$13: 3.3REG.6 SP-RC2.3
N$15: 3.3REG.1 SP-R4.1 SP-SW2.1
N$16: IC3.39 NT-R2.1
N$17: LED3.1 SJ1.2
N$18: IC3.21 NT-R4.1
N$19: IC1.87 IC2.1
N$20: IC1.86 IC2.4
N$21: IC3.24 NT-C2.1 NT-R3.2
N$22: IC3.20 NT-R5.1
N$23: IC3.18 NT-C3.2
N$24: 100.2 SP-LED2.C
N$25: 8MHZ.1 C6.2 IC1.13
N$26: 5VREG.1 SP-R2.1 SP-SW2.2
N$27: BAT-JP1.2 IC1.26
N$28: IC3.37 NT-C5.1
N$31: 8MHZ.2 C5.2 IC1.12
N$32: LED1.1 SJ2.2
N$34: CN1.10 NT-R10.2
N$35: CN1.11 NT-R11.2
N$36: BAT-JP1.1 BAT-R1.2 BAT-R2.1
N$37: LED4.1 SJ3.2
N$39: M-JP-VCC.2 MOTOR1.P$2 MOTOR2.P$2 MOTOR3.P$2 MOTOR4.P$2
N$40: LED2.1 SJ4.2
N$41: M-JP-GND.1 MOTOR1.P$3 MOTOR2.P$3 MOTOR3.P$3 MOTOR4.P$3
N$42: S4.3 S4.4 XB1.5 XBEE-RST.1
N$43: USB-POLY.2 X3.1
N$45: FET-R10.1 FETR2.7 T3.4
N$46: FET-R9.1 FETR2.8 T3.2
N$47: FET-R14.1 FETR2.5 T4.4
N$48: FET-R13.1 FETR2.6 T4.2
NRST: IC1.14 RESET-STM.3 RESET-STM.4 ST-LINKV2.5 STM-R1.1 TO-UI3.9
PING: IC1.93 PING.P$1
RD+: CN1.7 IC3.14 NT-R8.1
RD-: CN1.8 IC3.13 NT-R9.2
RO1-CHA: IC1.63 RO1.P$3 RO-R.8
RO1-CHB: IC1.64 RO1.P$4 RO-R.7
RO2-CHA: IC1.30 RO2.P$3 RO-R.6
RO2-CHB: IC1.89 RO2.P$4 RO-R.5
RPI-RX: IC1.97 X1.8
RPI-TX: IC1.98 X1.10
RS-CHA: IC2.6 RS485-S.1 TO-F7.6
RS-CHB: IC2.7 RS485-S.2 TO-F7.5
RS-SIG1: IC1.96 X1.38
RS-SIG2: IC1.95 X1.40
SCK: IC1.78 MPU-SIG.P$5 SPI-R.P$5
SCL: I2C-R1.2 I2C-R.P$2 IC1.67 JY901.P$2
SDA: I2C-R2.2 I2C-R.P$3 IC1.66 JY901.P$3
SPI-R-SS: IC1.82 SPI-R.P$1
SWCLK: IC1.76 ST-LINKV2.2 TO-UI3.10
SWDIO: IC1.72 ST-LINKV2.4 TO-UI3.11
TD+: CN1.1 IC3.17 NT-R6.2
TD-: CN1.2 IC3.16 NT-R7.1
USB-D+: IC1.54 X3.3
USB-D-: IC1.53 X3.2